# Altium PCB ife19_TS_TSAL-AIL-Discharge-TSMP.PcbDoc
Units mm, origin at the board's own origin, x right, y up, seen from the top; angles counter-clockwise.
Board outline 76.33 x 30.35 mm, 2 copper layers (Top Layer, Bottom Layer); 13 components, 15 nets, 49 pads, 9 vias.
Unrouted connection lines stored in the file: 1.
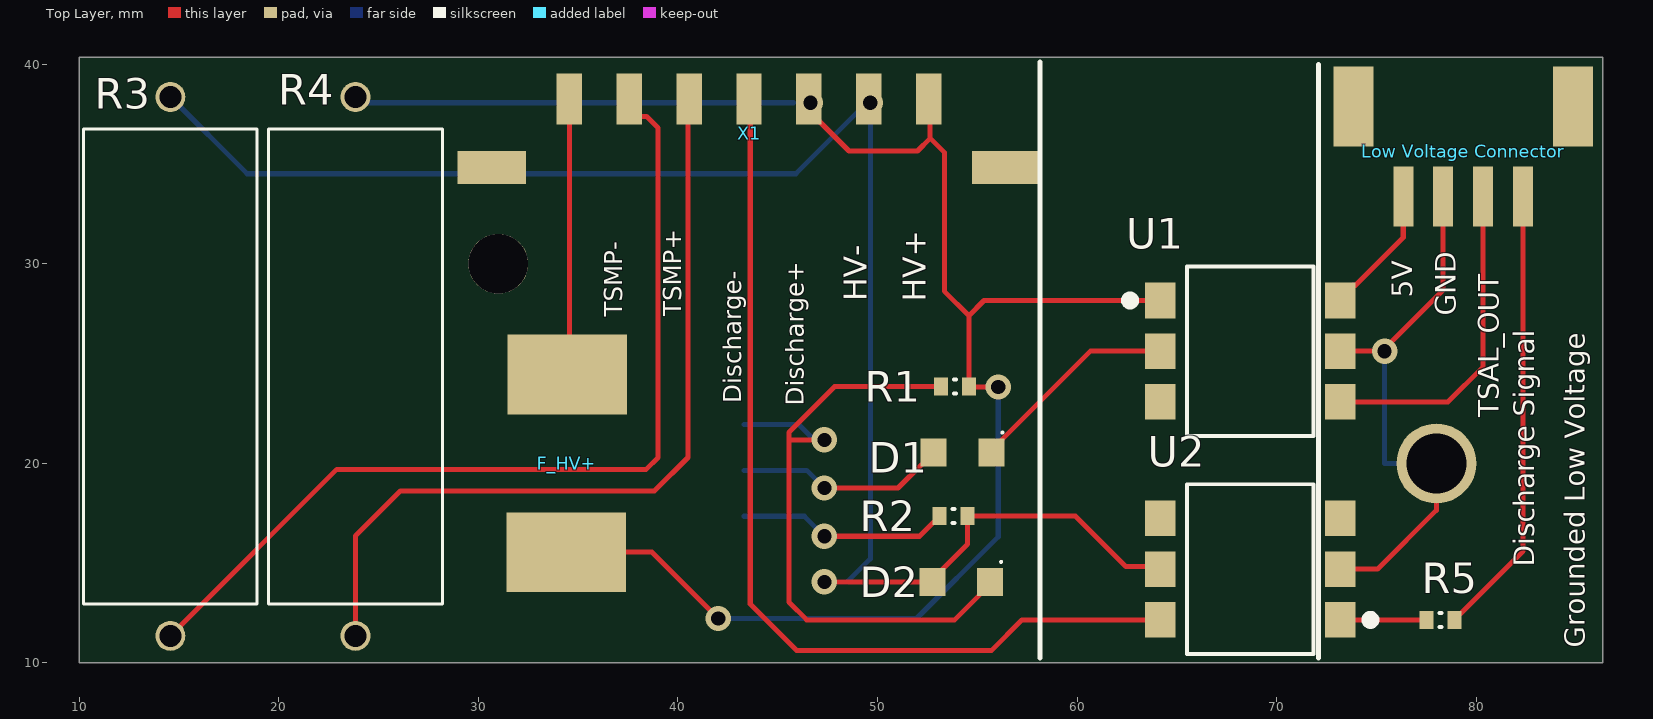
[diagram p0: Top Layer view]
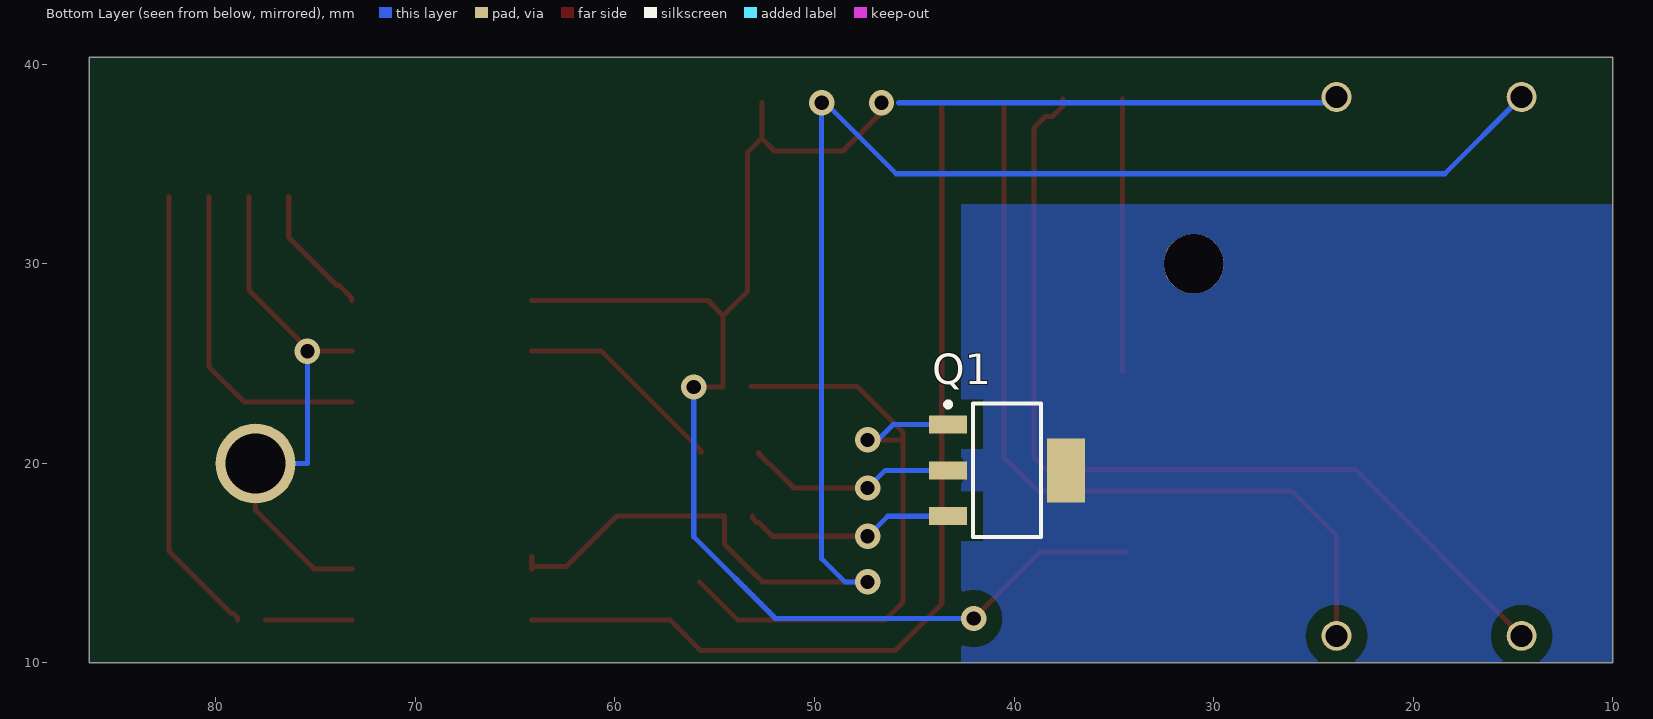
[diagram p1: Bottom Layer view, seen from below]

## Layer stack, top to bottom
Top Solder: solder mask 0.0102, Solder Resist, Dk 3.5
Top Layer: signal copper 0.0356
Dielectric 1: dielectric 0.32, FR-4, Dk 4.8
Bottom Layer: signal copper 0.0356
Bottom Solder: solder mask 0.0102, Solder Resist, Dk 3.5

## Board outline
10,10 10,40.353 86.327,40.353 86.327,10

## Design rules (kind name [scope] priority, off if disabled: settings)
Clearance [NOT(InNetClass('Low Voltage'))] p1: gap=0.8 ignorepadtopadclearanceinfootprint=TRUE
Clearance "Low Voltage" [InNetClass('Low Voltage')] p2: gap=0.203 ignorepadtopadclearanceinfootprint=TRUE
ComponentClearance [All] p1: gap=0.254 collisioncheckmode=3 verticalgap=0 showdistances=FALSE
PolygonConnect GOOD [All] p1: connectstyle=Direct reliefconductorwidth=0.254 reliefentries=4 polygonreliefangle="90 Angle" airgapwidth=0.254
RoomDefinition ife19_TS_TSAL-Discharge-TSMP [InComponentClass('ife19_TS_TSAL-Discharge-TSMP')] p1: confinementstyle=ConfineIn formatcopy=TRUE lockcomponents=FALSE outline 9.873,10 86.2,10 86.2,40.226 9.873,40.226
RoutingVias [All] p1: holewidth=0.711 width=1.27 viastyle="Through Hole" minholewidth=0.711 minwidth=1.27 maxholewidth=0.711 maxwidth=1.27
SolderMaskExpansion [All] p1: expansion=0.102
Width [All] p1: maxlimit=0.254 minlimit=0.254 preferedwidth=0.254
29 further rules are at their usual default settings.

## Classes and differential pairs
net class "Low Voltage": 5V "Discharge Signal" GND TSAL_OUT

## Components (designator, comment, footprint, x,y, rotation, side; value= is the part's Value field where it differs from the comment)
D1 "BZD27C56P-HE3-08" VISH-DO-219AB_V 54.258,20.541 r0 top
D2 "BZX84C10L" VISH-DO-219AB_V 54.196,14.064 r0 top
F_HV+ "FUSE_885" FUSE_885 34.45,20 r270 top
"Low Voltage Connector" "" 505575-04 79.342,33.876 r0 top
Q1 "PBHV8560ZX" NXP-SOT223_L 40.353,19.652 r180 bottom
R1 "218K 1% 0603(1608)" RESC0603(1608)_L 53.88,23.843 r0 top value="249000.00 Ohm"
R2 "8K 1% 0603(1608)" RESC0603(1608)_L 53.815,17.366 r180 top value="348000.00 Ohm"
R3 "10K" "Ohmite 45" 14.572,24.859 r90 top
R4 "10K" "Ohmite 45" 23.843,24.859 r90 top
R5 "5.4K 1% 0603(1608)" RESC0603(1608)_L 78.199,12.159 r0 top value="249000.00 Ohm"
U1 "H11L1SM" FAIR-SMT-6_V 68.674,25.621 r0 top
U2 "CS474" FAIR-SMT-6_V 68.674,14.699 r180 top
X1 "Molex - Micro-Fit 3.0 Series connector,  3.00mm (0.118\") pitch header, 7 positions." 43650-0724 43.525,34.75 r0 top

## Footprints (in the part's own frame and the unit in brackets; to place one, negate y for a bottom-side part, rotate by r counter-clockwise, add the part's x,y. Pads: shape width x height; smd on the part's side, far side on the other; paste and mask are expansions set on the pad)
43650-0724 [mm]
  rect 1.27x2.54 smd: P$1(9.036,3.503) P$2(6.036,3.503) P$3(3.036,3.503) P$4(0.036,3.503) P$5(-2.964,3.503) P$6(-5.964,3.503) P$7(-8.964,3.503)
  rect 3.43x1.65 smd: TAB1(12.926,0.073) TAB2(-12.854,0.073)
  body extent -14.32,-2.47 14.32,4.1, height 9.95
505575-04 [mm]
  rect 1x3 smd: 1(-3,-0.5) 2(-1,-0.5) 3(1,-0.5) 4(3,-0.5)
  rect 2x4 smd: P$3(-5.5,4) P$4(5.5,4)
FAIR-SMT-6_V [mm] "SMT, 6-Leads, Body 8.51x6.35mm, Pitch 2.54mm"
  rect 1.52x1.78 smd: 1(-4.51,2.54) 2(-4.51,0) 3(-4.51,-2.54) 4(4.51,-2.54) 5(4.51,0) 6(4.51,2.54)
  silkscreen extent -6.22,-4.26 3.17,4.26, body extent -3.17,-4.26 3.17,4.26, height 5.08
FUSE_885 [mm]
  rect 4x6 smd: 1(-4.45,0) 2(4.45,-0.05)
  body extent -5.45,-2.4 5.45,2.4, height 4.95
NXP-SOT223_L [mm] "SOT223, 4-Leads, Body 6.7x3.7mm, Pitch 2.3mm, IPC High Density"
  rect 1.9x0.9 smd: 1(-2.95,2.3) 2(-2.95,0) 3(-2.95,-2.3)
  rect 1.9x3.2 smd: 4(2.95,0)
  silkscreen extent -3.08,-3.35 1.7,3.42, body extent -1.85,-3.35 1.85,3.35, height 1.8
"Ohmite 45" [mm]
  round 1.5 hole 1.1: 1(-13.5,0) 2(13.5,0)
  silkscreen extent -11.9,-4.35 11.9,4.35, body extent -11.95,-4.35 11.85,4.35, height 8.85
RESC0603(1608)_L [mm] "Chip Resistor, Body 1.6x0.8mm, IPC High Density"
  rect 0.7x0.9 smd: 1(-0.7,0) 2(0.7,0)
  silkscreen extent -0.05,-0.35 0.05,0.35, body extent -0.85,-0.47 0.85,0.47, height 0.6
VISH-DO-219AB_V [mm] "SODFL, 2-Leads, Body 1.90x2.9mm"
  rect 1.3x1.4 smd: 1(-1.45,0) 2(1.45,0)
  silkscreen extent 1.95,0.95 2.05,1.05, body extent -1.85,-0.95 1.85,0.95, height 1.08

## Part data
D1 D2: library part CMP-1711-00001-1, "Schottky Rectifier, 30 V, 1.1 A, 2-Pin DO-219AB (SMF), RoHS, Tape and Reel", Manufacturer="Vishay Semiconductor", PartNumber=SL03-GS08CT, ComponentLink1Description="Manufacturer URL", ComponentLink1URL=http://www.vishay.com/, ComponentLink2Description=Datasheet, ComponentLink2URL=http://www.vishay.com/docs/85687/sl02.pdf, DatasheetVersion="Rev. 2.0", Mounting Technology="Surface Mount", PackageDescription="2-Pin Small Outline Diode, Flat Lead, Body 1.90 x 2.9 mm", PackageReference=DO-219AB
"Low Voltage Connector": library part 505575-04, DeviceSetName=505575-04, GateName_1=G$1, LibraryName="MOLEX Micro-Lock", Package=505575-04, SymbolName_1=4POS
Q1: library part CMP-2000-05940-1, "NPN Medium Power Transistor, 60 V, 1 A, -55 to 150 degC, 4-Pin SOT223, RoHS, Tape and Reel", Current - Collector (Ic) (Max)=1A, Current - Collector Cutoff (Max)=100nA(ICBO), DC Current Gain (hFE) (Min) @ Ic, Vce=100@150mA,2V, Frequency - Transition=180MHz, Manufacturer="NXP Semiconductors", Package / Case=TO-261-4,TO-261AA, Package Description="4-Pin Small Outline Transistor Package, Body 6.5 x 3.5 mm, Pitch 2.3 mm", Package Reference=SOT223, Package Version="06-03-16, 03/2006", Power - Max=1.35W, Standard Package=1, Supplier Device Package=SC-73, Voltage - Collector Emitter Breakdown (Max)=60V, Category=DiscreteSemiconductorProducts, Datasheet URL=http://www.nxp.com/documents/data_sheet/BCP55_BCX55_BC55PA.pdf?fasp=1&WT_TYPE=Data%20Sheets&WT_VENDOR=FREESCALE&WT_FILE_FORMAT=pdf&WT_ASSET=Documentation&fileExt=.pdf, Datasheet Version="Rev. 8, 10/2011", Family=Transistors(BJT)-Single, Featured Product=NXP-I睠Interface, Manufacturer URL=http://www.nxp.com/, Mounting Technology=SurfaceMount, Mounting Type=SurfaceMount, Online Catalog=NPNTransistors, Other Names=568-8013-6, Package URL=http://www.nxp.com/documents/outline_drawing/SOT223.pdf, Packaging=Digi-Reel®, PCN Design/Specification=ResinHardener02/Jul/2013, PCN Packaging=LighterReels02/Jan/2014, Series=-, Transistor Type=NPN, Vce Saturation (Max) @ Ib, Ic=500mV@50mA,500mA
R1 R5: library part CMP-1012-00779-1, "249K 0.1W 1% 0603 (1608 Metric)  SMD", Case-EIA=0603, Case-Metric=1608, Power="0.1 W", Tolerance="1 %", Technology=SMT
R2: library part CMP-1012-00796-1, "348K 0.1W 1% 0603 (1608 Metric)  SMD", Case-EIA=0603, Case-Metric=1608, Power="0.1 W", Tolerance="1 %", Technology=SMT
R3 R4: library part "Ohmite 40 Series"
U1 U2: library part CMP-2000-06383-1, "Schmitt Trigger Output Optocoupler, 3 to 15 V, -40 to 85 degC, 6-Pin SMT, RoHS, Tube", Forward Current=30mA, Forward Voltage=1.5V, Isolation Voltage=7500Vrms, Manufacturer="Fairchild Semiconductor", Operating Temperature Classification=Industrial, Operating Temp Range=-40Cto85C, Output Current=50mA, Package Description="6-Pin Surface Mount Device, Body 8.51 x 6.35 mm, Pitch 2.54 mm", Package Reference=SMT-6, Package Type=PDIPSMDWhite, Power Dissipation=250mW, Reverse Breakdown Voltage=6V, Datasheet URL=http://www.mouser.com/ds/2/149/H11L1M-185291.pdf, Datasheet Version="Rev. 1.0.7, 09/2014", Input Type=DC, Manufacturer URL=https://www.fairchildsemi.com/, Mounting=SurfaceMount, Mounting Technology=SurfaceMount, Number of  Elements=1, Output Type=OpenCollector, Pin Count=6, Propagation Delay Time=4000ns
X1: library part POS7_MF43650-0724, Package=43650-0724, DeviceName=43650-0724, DeviceSetName=HEADER_POS7_?, GateName_1=G$1, LibraryName="MOLEX Micro-Fit", SymbolName_1=HEADER_POS7

## Free pads (board coordinates)
  round 3 hole 3 unplated: 3(31,30)
  round 4 hole 3: 3(78,20)

## Via types
v1: diameter 1.27, hole 0.711, Top Layer to Bottom Layer, 9 vias

## Nets (pads, with @x,y where several pads share a name; then routed paths per layer and width w, separated by ;. In a path a pad name is that pad's centre, name@x,y a point inside that pad or via, vN(x,y) a via of type N, cw(c..) or ccw(c..) an arc to the next point about the centre after c; other vN are vias at no path point)
5V: "Low Voltage Connector.1" U1.6 | length 6.6
  Top Layer w0.254: U1.6 73.184,28.291 73.817,28.924 73.947,28.924 76.342,31.319 76.342,33.376
"Discharge Signal": "Low Voltage Connector.4" R5.2 | length 22.7
  Top Layer w0.254: R5.2 78.899,12.259 79.122,12.482 79.222,12.482 82.342,15.602 82.342,33.376
Discharge+: F_HV+.2 R1.2 R4.2 U1.1 X1.P$1 X1.P$3 | length 88.3
  Top Layer w0.254: F_HV+.2 38.7,15.55 v1(42.025,12.225) ; v1(46.64,38.068) 46.64,37.583 48.569,35.654 51.998,35.654 52.64,36.296 ; X1.P$1@52.64,38.068 52.64,36.296 ; v1(56.05,23.825) 54.598,23.825 R1.2 54.58,27.396 ; U1.1 55.339,28.161 54.58,27.402 54.58,27.396 ; 52.64,36.296 53.35,35.586 53.35,28.626 54.58,27.396
  Bottom Layer w0.254: R4.2 24.134,38.068 45.79,38.068 ; v1(42.025,12.225) 51.95,12.225 56.05,16.325 v1(56.05,23.825)
Discharge-: U2.6 X1.P$4 | length 47.2
  Top Layer w0.254: X1.P$4@43.625,38.068 43.625,12.951 45.941,10.635 55.72,10.635 57.244,12.159 U2.6
GND: "Low Voltage Connector.2" pad.3@78,20 U1.5 U2.2 | length 27.6
  Top Layer w0.254: U2.2 75.049,14.699 78,17.65 pad.3@78,20 ; U1.5 v1@75.278,25.621 ; v1@75.342,25.685 78.342,28.685 78.342,33.376
  Bottom Layer w0.254: v1(75.405,25.621) 75.405,20 pad.3@78,20
HV+_SENSE: F_HV+.1 X1.P$7 | length 13.7
  Top Layer w0.254: F_HV+.1@34.561,24.6 X1.P$7
HV-: D2.1 R2.1 R3.2 U2.5 X1.P$2 | length 84.5
  Top Layer w0.254: v1(47.338,14.064) 52.621,14.064 52.621,14.089 52.944,14.412 52.969,14.412 54.515,15.958 R2.1 59.911,17.366 62.451,14.826 64.037,14.826 U2.5 U2.5@64.164,15.334
  Bottom Layer w0.254: R3.2 18.42,34.511 45.875,34.511 ; 45.902,34.511 49.459,38.068 v1(49.64,38.068) 49.64,15.223 48.481,14.064 v1(47.338,14.064)
NetD1_1: D1.1 pad.3@31,30 Q1.2 Q1.4 | length 10.6
  Top Layer w0.254: v1(47.338,18.763) 51.03,18.763 52.235,19.968 52.285,19.968 52.808,20.491 D1.1
  Bottom Layer w0.254: Q1.2 46.449,19.652 v1(47.338,18.763)
NetD1_2: D1.2 U1.2 | length 10.7
  Top Layer w0.254: D1.2 55.646,20.603 60.664,25.621 U1.2
NetD2_2: D2.2 Q1.1 R1.1 | length 35
  Top Layer w0.254: v1(47.338,21.176) 45.56,21.176 ; R1.1 47.846,23.843 45.56,21.557 45.56,21.176 ; D2.2@55.771,14.064 53.866,12.159 46.449,12.159 45.56,13.048 45.56,21.176
  Bottom Layer w0.254: Q1.1 46.054,21.952 47.211,20.795 47.338,20.922 v1(47.338,21.176)
NetQ1_3: Q1.3 R2.2 | length 10.7
  Top Layer w0.254: v1(47.338,16.35) 52.099,16.35 52.792,17.043 52.892,17.043 53.115,17.266 R2.2
  Bottom Layer w0.254: Q1.3 46.336,17.352 v1(47.338,16.35)
NetR5_1: R5.1 U2.1 | length 4.3
  Top Layer w0.254: U2.1 R5.1
TSAL_OUT: "Low Voltage Connector.3" U1.4 | length 16.4
  Top Layer w0.254: U1.4 78.58,23.081 80.342,24.843 80.342,33.376
TSMP+: R4.1 X1.P$5 | length 41.1
  Top Layer w0.254: R4.1 23.843,16.368 26.1,18.625 38.825,18.625 40.5,20.3 X1.P$5@40.5,38.068
TSMP-: R3.1 X1.P$6 | length 46.9
  Top Layer w0.254: R3.1 22.913,19.7 38.409,19.7 39.009,20.3 39.009,36.805 38.429,37.386 38.069,37.386 37.561,37.894 X1.P$6
pads on no net: "Low Voltage Connector.P$3" "Low Voltage Connector.P$4" U1.3 U2.3 U2.4 X1.TAB1 X1.TAB2

## Polygon pours and split planes (outlines as drawn)
NetD1_1 on Bottom Layer "Bottom Layer-No Net 2" (solid, pour order 28): 10,10 42.639,10 42.639,32.987 10,32.987

## Silkscreen, mask and mechanical layers (free items; w line width, h text height)
Top Overlay:
  lines w0.254: 58.133,10.254 58.133,40.099 ; 72.103,10.254 72.103,39.972
  text "5V" at 76.802,28.288 h1.02 r90
  text "HV-" at 49.45,28.125 h1.14 r90
  text "HV+" at 52.425,28.1 h1.14 r90
  text "GND" at 78.961,27.399 h1.02 r90
  text "TSMP+" at 40.175,27.375 h0.89 r90
  text "TSMP-" at 37.2,27.35 h0.89 r90
  text "Discharge-" at 43.175,23 h0.89 r90
  text "Discharge+" at 46.3,22.875 h0.89 r90
  text "TSAL_OUT" at 81.12,22.319 h1.02 r90
  text "Discharge Signal" at 82.898,14.826 h1.02 r90
  text "Grounded Low Voltage" at 85.438,10.762 h1 r90
Mechanical 1:
  the board outline again, w0.15

## Dimensions
71.475,37.348 to 58.775,37.348 on Top Overlay